# EAGLE board schematic (EAGLE 7.4.0)
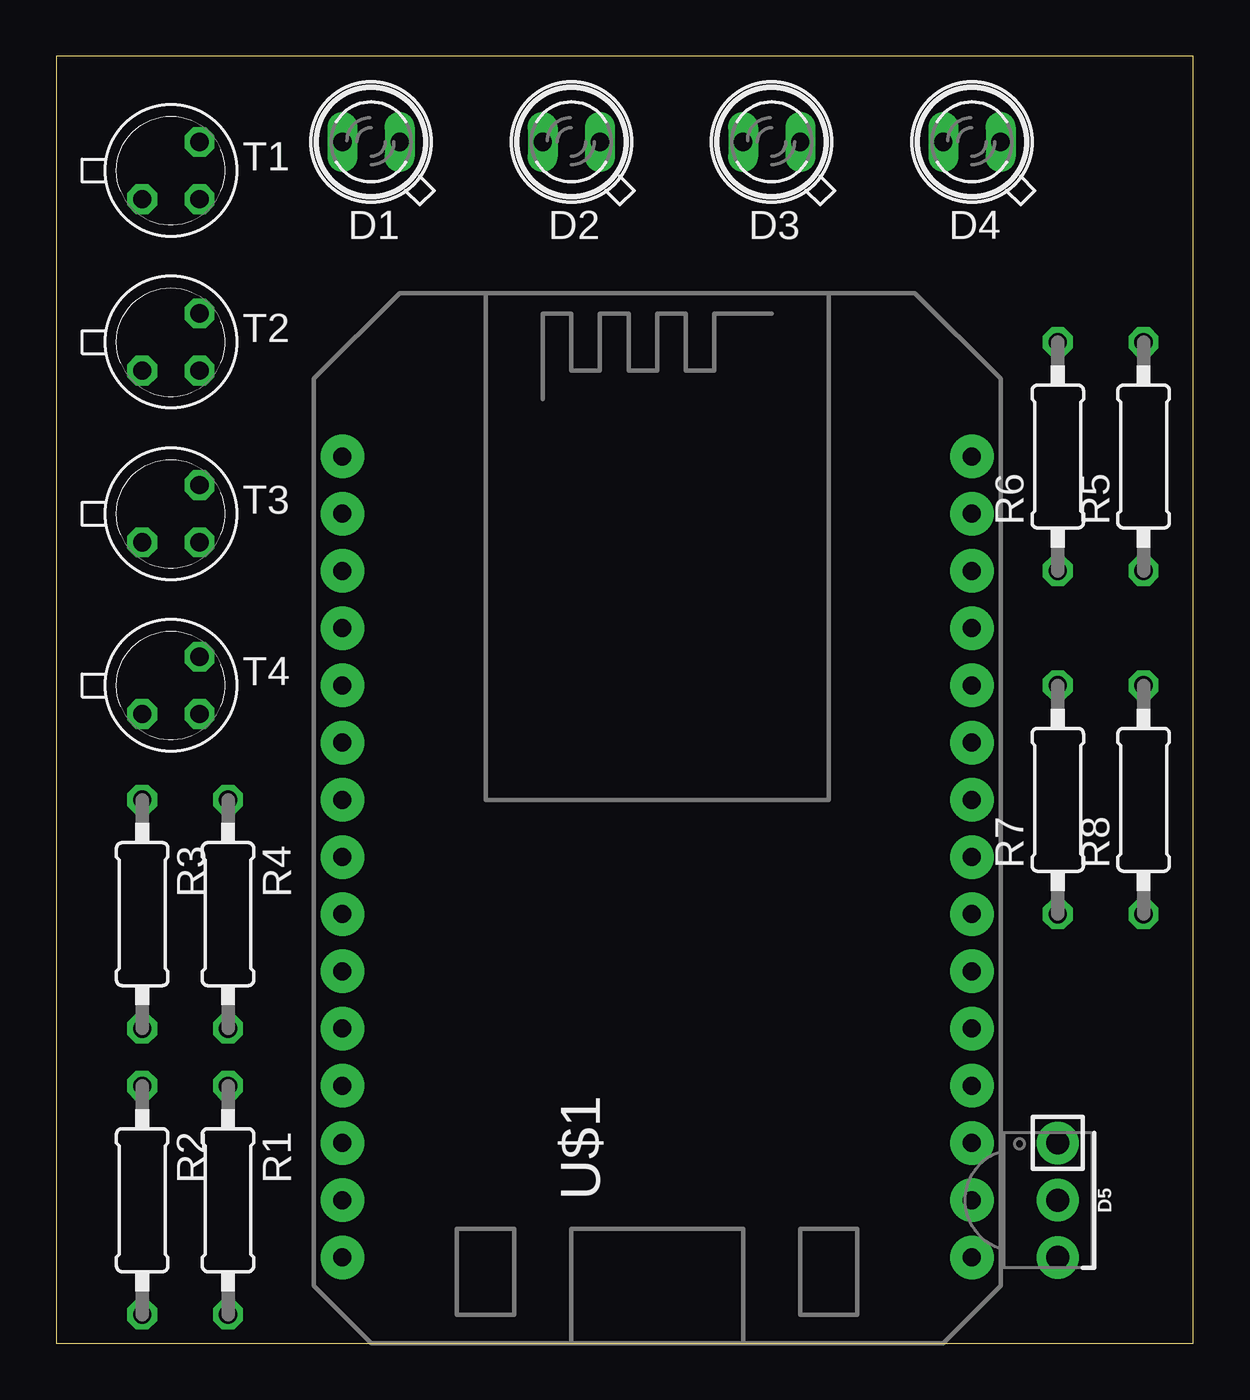
[diagram p0: board, top side]
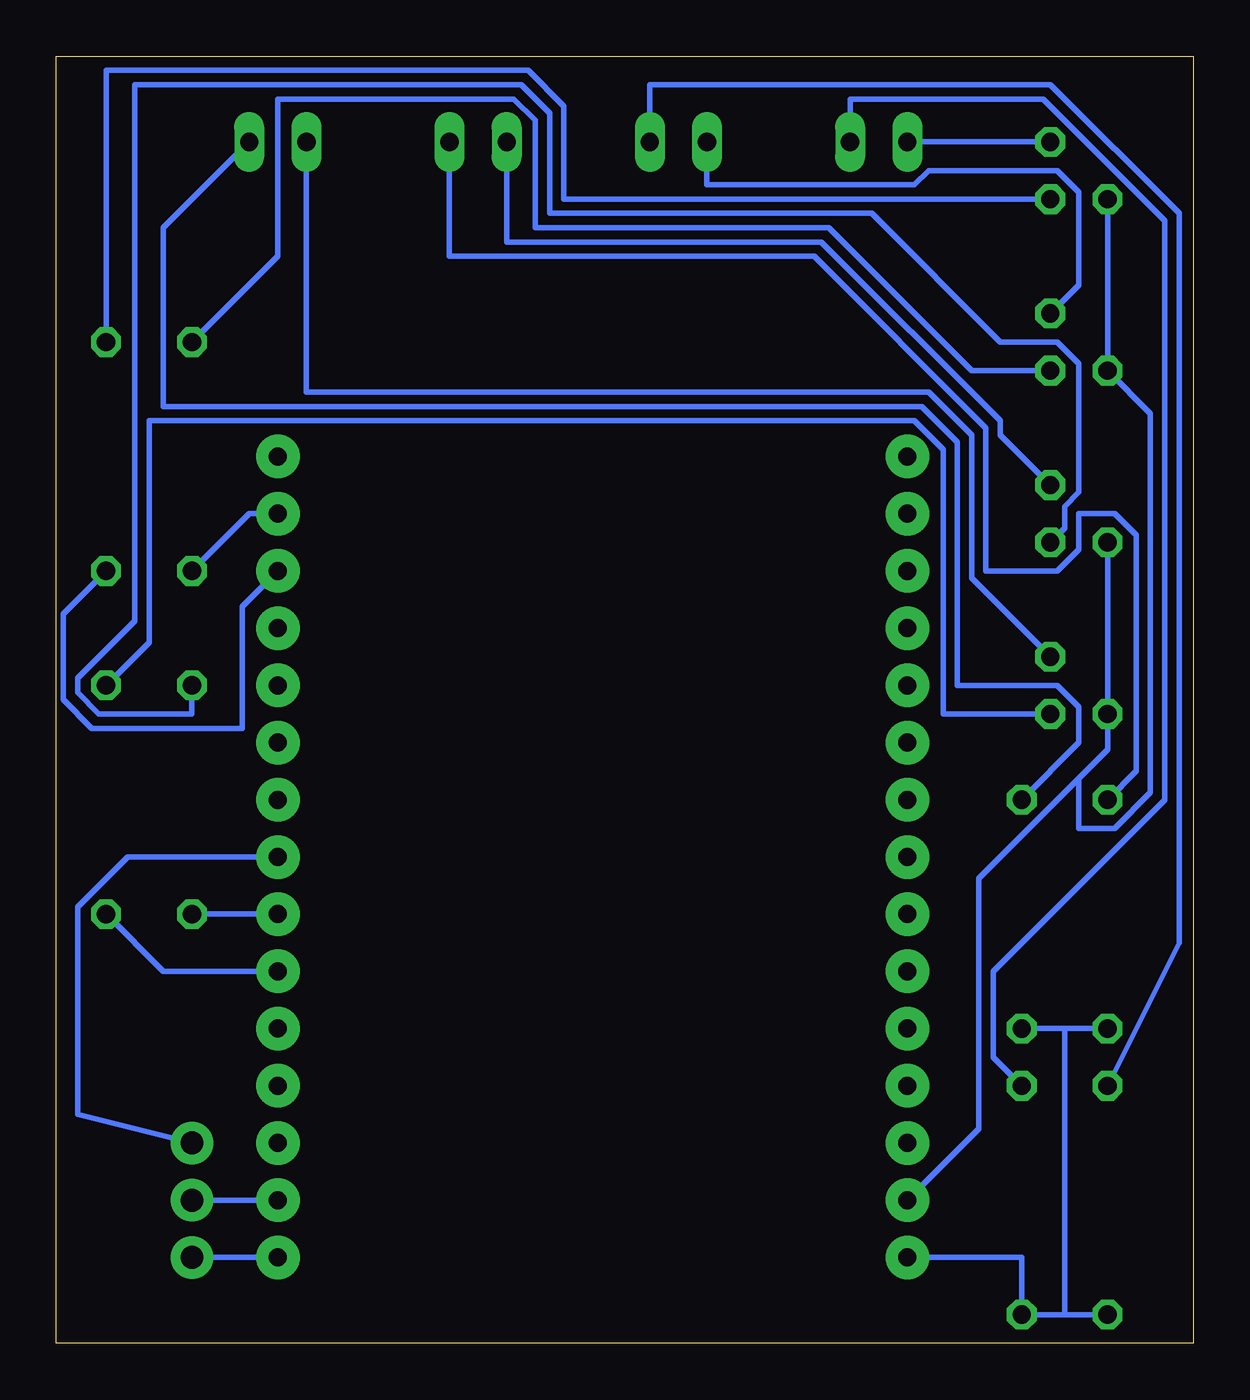
[diagram p1: board, bottom side, seen from below]

Size 50.47 x 57.14 mm. Coordinates in mm from the lower left corner, seen from the top.
Outline: 0,0 50.47,0 50.47,57.14 0,57.14 0,0
Copper layers (1*16): Top 0.035mm / dielectric 1.5mm / Bottom 0.035mm
Design rules "default": minimum track width 10mil, minimum drill 24mil, track to track 8mil, track to pad 8mil, pad to pad 8mil, via to via 8mil, smd to smd 8mil, copper to edge 40mil, drill to drill 8mil, minimum pad ring 10mil, minimum via ring 8mil, stop-mask expansion 4mil, vias tented up to drill 0mil, thermal gap 10mil
Net classes: 0 default: width 0.254 mm, clearance 0.254 mm

## Footprints (pad centres in the part's own frame; a part is rotated, then mirrored left to right if it is on the bottom)
SFH482 = drill 0.813 long: A -1.27,0; K 1.27,0
BRM-2508 = drill 1.016 pad 1.88: 1 -2.54,0; 2 0,0; 3 2.54,0
0207/10 = drill 0.813 octagon: 1 -5.08,0; 2 5.08,0
TO18 = drill 0.813 octagon: 1 -1.27,-1.27; 2 1.27,-1.27; 3 1.27,1.27
ESP12_DEVKIT = drill 0.8 pad 1.93: 3V3@0 -13.97,-7.62; 3V3@1 13.97,5.08; 3V3@2 13.97,-17.78; 3V3@3 -13.97,-2.54; 5V -13.97,-17.78; A0 -13.97,17.78; D0 13.97,17.78; D1 13.97,15.24; D2 13.97,12.7; D3 13.97,10.16; D4 13.97,7.62; D5 13.97,0; D6 13.97,-2.54; D7 13.97,-5.08; D8 13.97,-7.62; EN -13.97,-10.16; GND@0 -13.97,-5.08; GND@1 -13.97,-15.24; GND@2 13.97,2.54; GND@3 13.97,-15.24; GND@4 -13.97,0; RST -13.97,-12.7; RSV@0 -13.97,15.24; RSV@1 -13.97,12.7; RSV@2 -13.97,10.16; RSV@3 -13.97,7.62; RSV@4 -13.97,5.08; RSV@5 -13.97,2.54; RX 13.97,-10.16; TX 13.97,-12.7

## Placement (x,y rotation side)
D1  SFH482  [SFH482]  13.97,53.34 180 top
D2  SFH482  [SFH482]  22.86,53.34 180 top
D3  SFH482  [SFH482]  31.75,53.34 180 top
D4  SFH482  [SFH482]  40.64,53.34 180 top
D5  BRM-2A18RA  [BRM-2508]  44.45,6.35 270 top
R1  [0207/10]  7.62,6.35 270 top
R2  [0207/10]  3.81,6.35 270 top
R3  [0207/10]  3.81,19.05 270 top
R4  [0207/10]  7.62,19.05 270 top
R5  [0207/10]  48.26,39.37 90 top
R6  [0207/10]  44.45,39.37 90 top
R7  [0207/10]  44.45,24.13 90 top
R8  [0207/10]  48.26,24.13 90 top
T1  2N2222  [TO18]  5.08,52.07 0 top
T2  2N2222  [TO18]  5.08,44.45 0 top
T3  2N2222  [TO18]  5.08,36.83 0 top
T4  2N2222  [TO18]  5.08,29.21 0 top
U$1  ESP12_DEVKIT  [ESP12_DEVKIT]  26.67,21.59 0 top

## Library data of the parts
D1-D4 = led
D5 = sparkfun-sensors
R1-R8 = resistor
T1-T4 = transistor
U$1 = esp12devkit

## Nets
N$1: R1.2 R2.2 R3.2 R4.2 U$1.5V
N$2: D1.A R1.1
N$3: D2.A R2.1
N$4: D4.A R4.1
N$5: D1.K T1.3
N$6: D2.K T2.3
N$7: D3.K T3.3
N$8: D3.A R3.1
N$9: T1.1 T2.1 T3.1 T4.1 U$1.GND@1
N$10: R5.2 T1.2
N$11: R6.2 T2.2
N$12: R7.2 T3.2
N$13: R8.2 T4.2
N$14: D5.3 U$1.3V3@2
N$15: D5.2 U$1.GND@3
N$16: D5.1 U$1.D5
N$17: R5.1 U$1.D2
N$18: R6.1 U$1.D1
N$19: R7.1 U$1.D6
N$20: R8.1 U$1.D7
N$21: D4.K T4.3

## Tracks (layer width: path | path; a pad name or v marks a point on that pad's centre or on a via)
N$1
  Bottom 0.254: R4.2 5.71,13.97 | 5.71,13.97 R3.2 | 5.71,1.27 R1.2 7.62,3.81 U$1.5V | 5.71,1.27 R2.2 | 5.71,1.27 5.71,13.97
N$2
  Bottom 0.254: R1.1 8.89,12.7 8.89,16.51 1.27,24.13 1.27,49.85 6.67,55.24 15.24,55.24 D1.A
N$3
  Bottom 0.254: R2.1 0.63,17.78 0.63,50.16 6.35,55.88 24.13,55.88 D2.A
N$4
  Bottom 0.254: R4.1 5.08,26.67 5.08,28.26 6.03,29.21 10.48,29.21 10.48,40.01 12.06,41.59 45.72,41.59 45.72,49.53 D4.A
N$5
  Bottom 0.254: D1.K T1.3
N$6
  Bottom 0.254: T2.3 5.08,46.99 5.08,51.12 6.03,52.07 11.75,52.07 12.38,51.44 21.59,51.44 D2.K
N$7
  Bottom 0.254: T3.3 8.57,40.32 8.57,40.96 16.51,48.9 30.48,48.9 D3.K
N$8
  Bottom 0.254: R3.1 2.54,25.4 2.54,35.88 3.49,36.83 5.08,36.83 5.08,35.24 6.03,34.29 9.21,34.29 9.21,40.64 16.83,48.26 33.02,48.26 D3.A
N$9
  Bottom 0.254: T1.1 T2.1 1.91,41.27 1.91,24.45 3.49,22.86 5.08,22.86 5.08,25.08 | T3.1 T4.1 3.81,26.35 5.08,25.08 | U$1.GND@1 9.52,9.53 9.52,20.64 5.08,25.08
N$10
  Bottom 0.254: T1.2 27.94,50.8 27.94,54.93 29.53,56.52 48.26,56.52 R5.2
N$11
  Bottom 0.254: T2.2 9.84,43.18 16.19,49.53 29.21,49.53 29.21,54.29 30.16,55.24 40.64,55.24 40.64,48.26 R6.2
N$12
  Bottom 0.254: T3.2 5.71,36.2 5.71,37.15 5.08,37.78 5.08,43.5 6.03,44.45 8.57,44.45 14.29,50.16 28.58,50.16 28.58,54.61 29.84,55.88 46.99,55.88 46.99,32.07 49.53,29.53 49.53,28.89 48.58,27.94 44.45,27.94 R7.2
N$13
  Bottom 0.254: T4.2 11.11,27.94 11.11,39.69 12.38,40.96 46.35,40.96 46.35,31.11 R8.2
N$14
  Bottom 0.254: U$1.3V3@2 D5.3
N$15
  Bottom 0.254: U$1.GND@3 D5.2
N$16
  Bottom 0.254: D5.1 49.53,10.16 49.53,19.37 47.31,21.59 U$1.D5
N$17
  Bottom 0.254: R5.1 50.16,32.38 50.16,28.57 48.9,27.3 42.23,27.3 42.23,32.7 U$1.D2
N$18
  Bottom 0.254: R6.1 41.91,36.83 U$1.D1
N$19
  Bottom 0.254: U$1.D6 R7.1
N$20
  Bottom 0.254: R8.1 45.72,16.51 U$1.D7
N$21
  Bottom 0.254: T4.3 9.84,33.97 9.84,40.32 11.75,42.23 39.37,42.23 D4.K